# Altium PCB Kayan22v1.PcbDoc
Units mil, origin at the board's own origin, x right, y up, seen from the top; angles counter-clockwise.
Board outline 2340 x 2240 mil, 2 copper layers (Top Layer, Bottom Layer); 31 components, 58 nets, 160 pads, 41 vias.
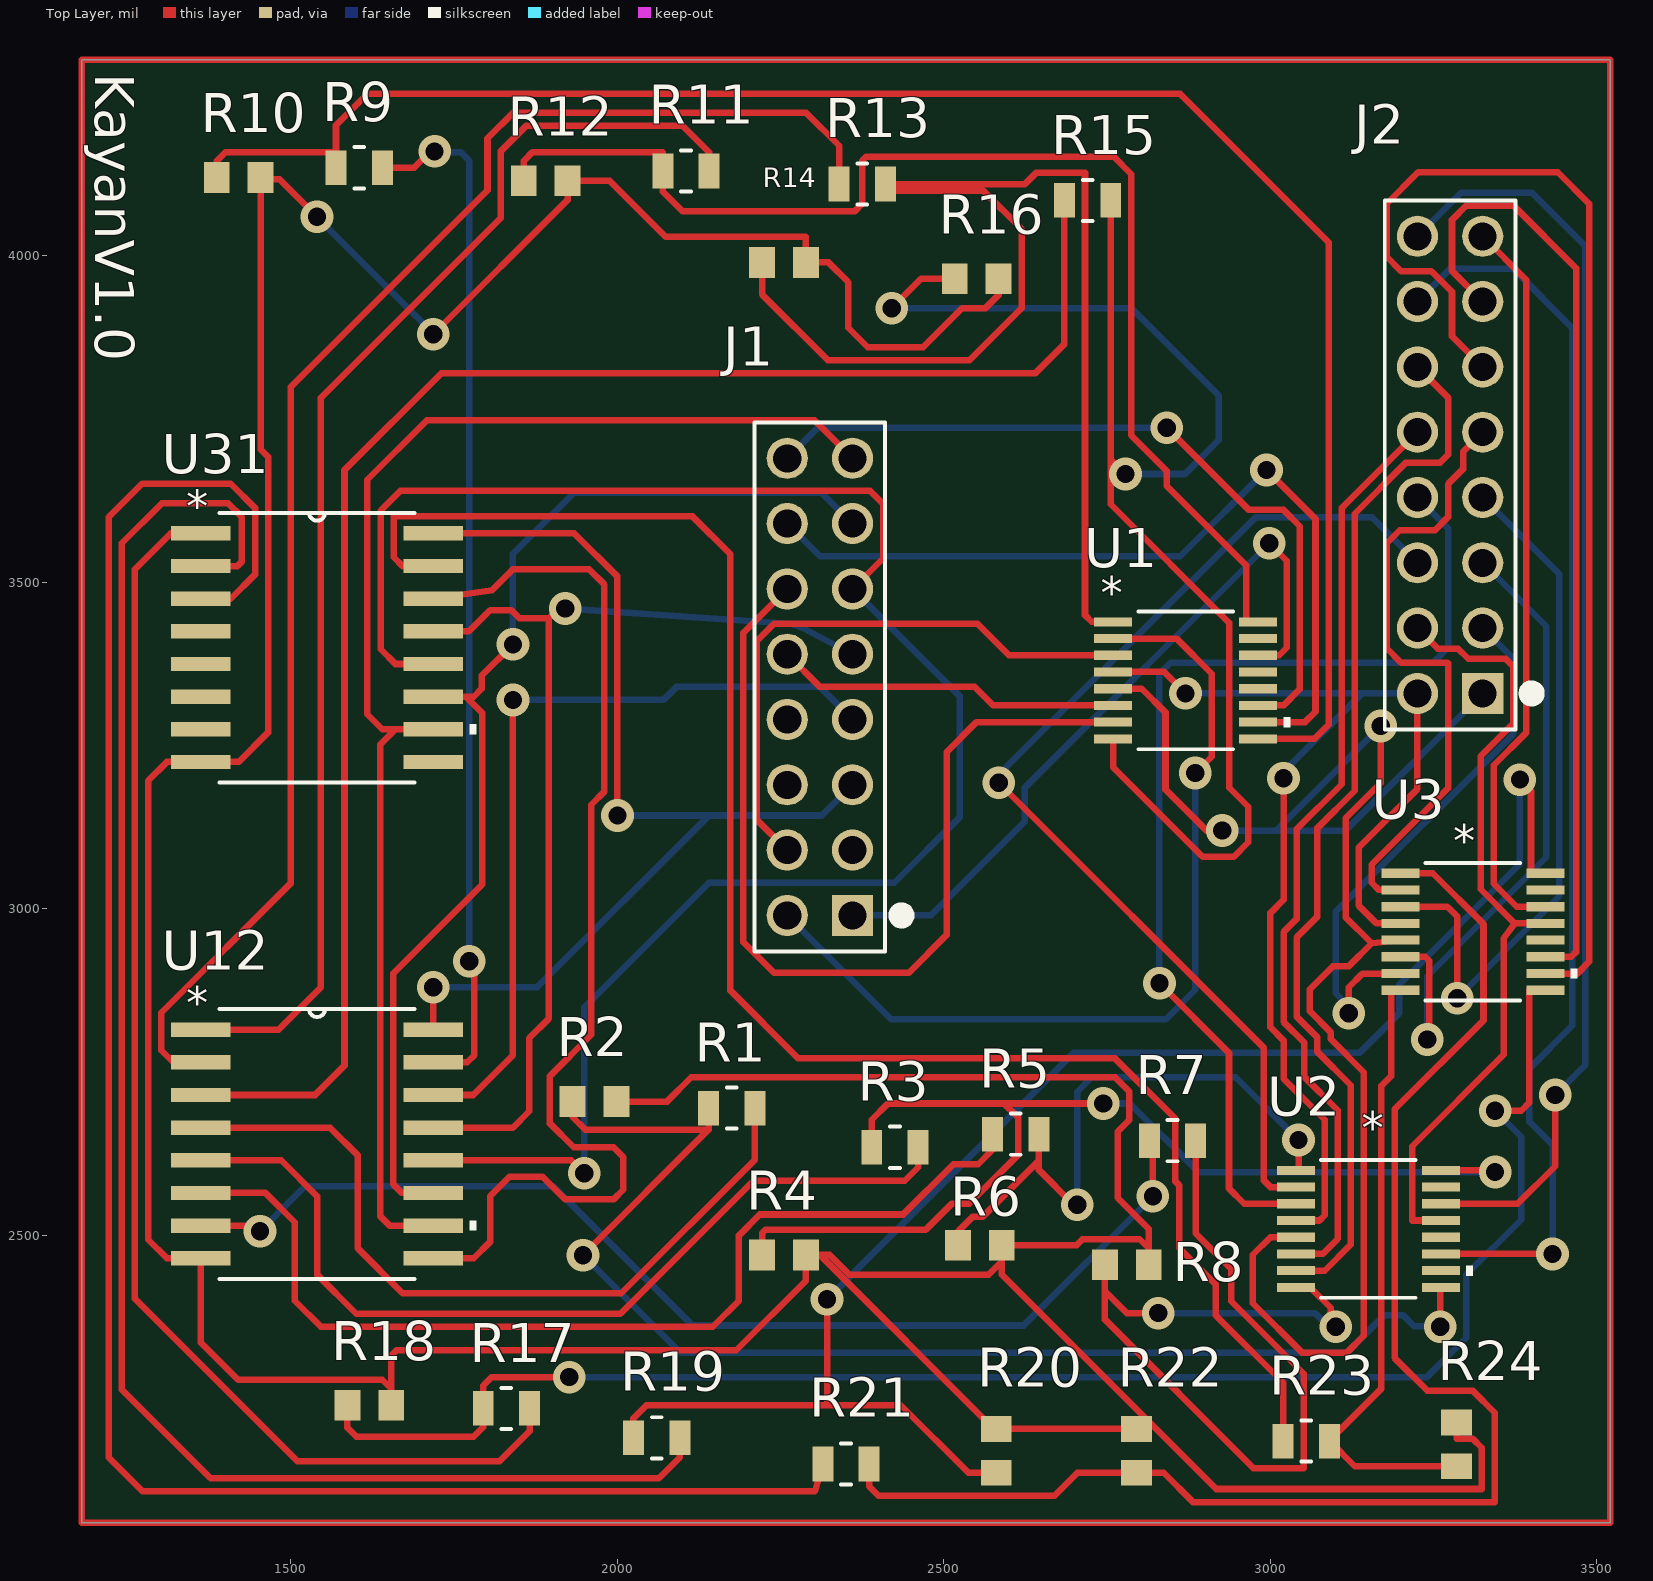
[diagram p0: Top Layer view]
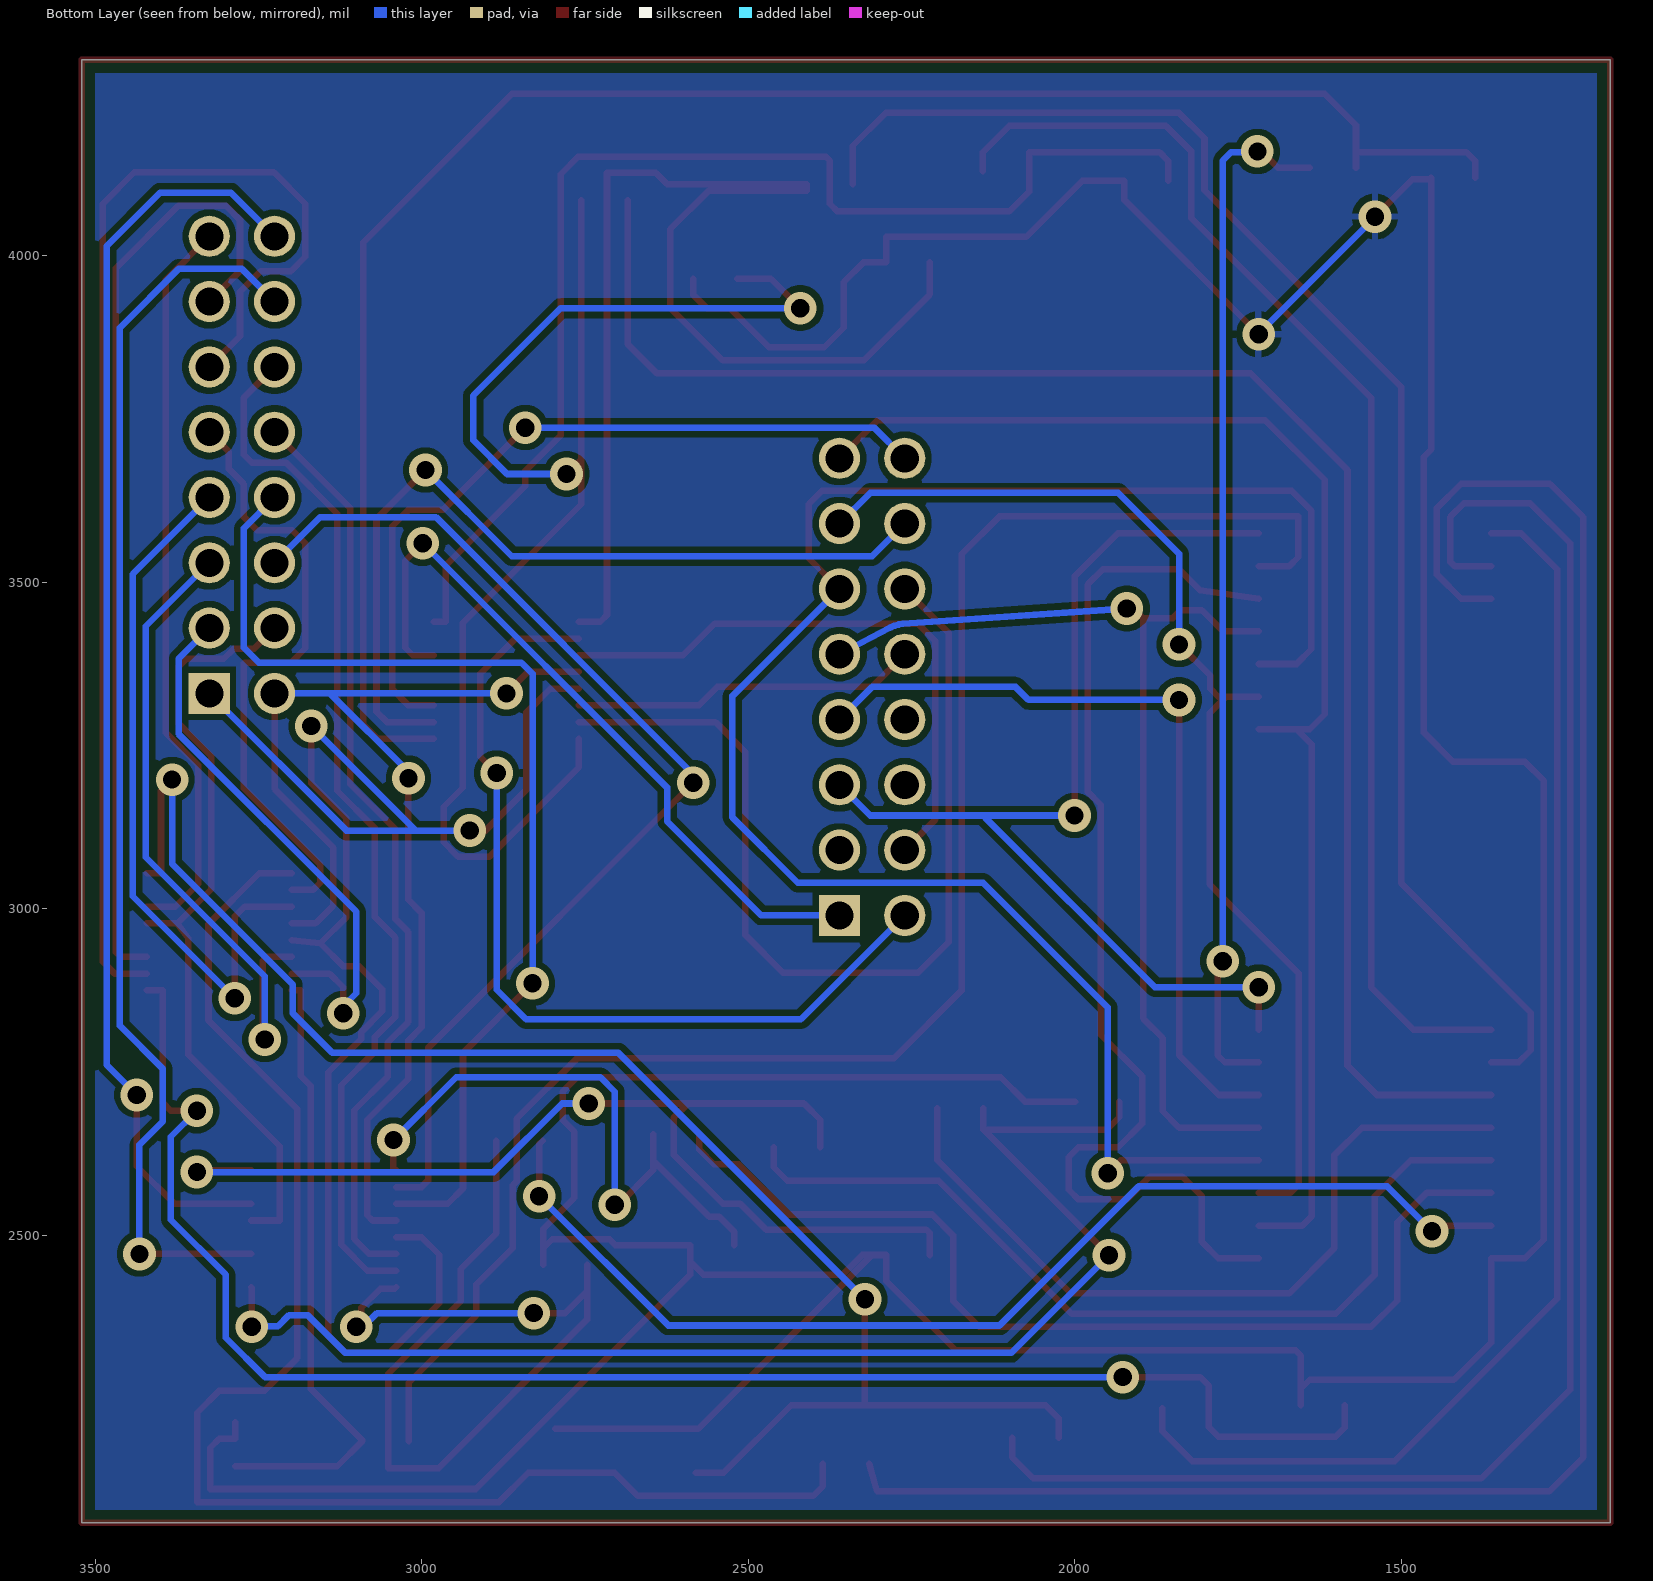
[diagram p1: Bottom Layer view, seen from below]
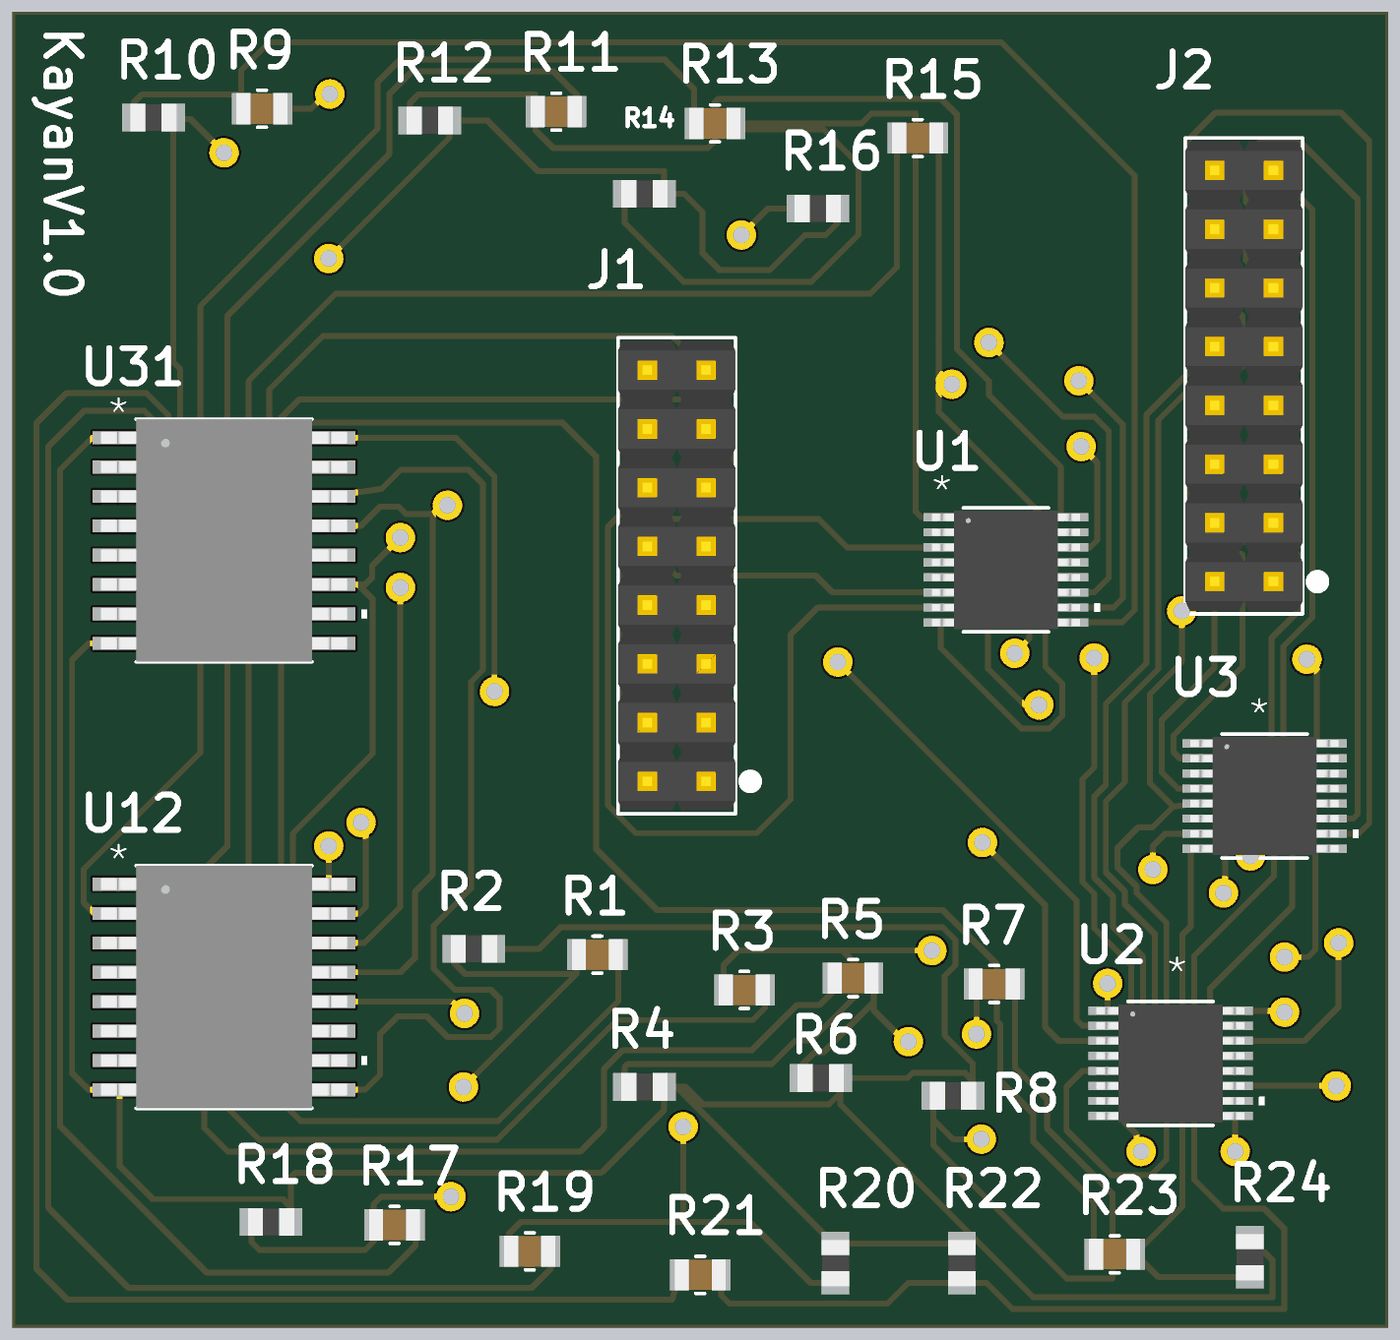
[diagram p2: 3D render of the assembled board from above, using the file's embedded part models]

## Layer stack, top to bottom
Top Solder: solder mask 0.4, Solder Resist, Dk 3.5
Top Layer: signal copper 1.4
Dielectric 1: dielectric 12.6, FR-4, Dk 4.8
Bottom Layer: signal copper 1.4
Bottom Solder: solder mask 0.4, Solder Resist, Dk 3.5

## Board outline
1180,2060 1180,4300 3520,4300 3520,2060

## Design rules (kind name [scope] priority, off if disabled: settings)
Clearance [All] p1: gap=10 ignorepadtopadclearanceinfootprint=FALSE except(0: Arc-Hole Track-Hole SMDPad-Hole THPad-Hole Via-Hole Fill-Hole Poly-Hole Region-Hole Text-Hole)
PolygonConnect [All] p1: connectstyle=Relief reliefconductorwidth=10 reliefentries=4 polygonreliefangle="90 Angle" airgapwidth=10
RoutingVias [All] p1: holewidth=28 width=50 viastyle="Through Hole" minholewidth=28 minwidth=50 maxholewidth=28 maxwidth=50
SolderMaskExpansion [All] p1: expansion=4 istentingtop=FALSE
Width [All] p1: maxlimit=10 minlimit=10 preferedwidth=10
30 further rules are at their usual default settings.

## Components (designator, comment, footprint, x,y, rotation, side; value= is the part's Value field where it differs from the comment)
J1 "68602-116HLF" CONN_68602-116HLF_AMP 2360,2990 r90 top
J2 "68602-116HLF" CONN_68602-116HLF_AMP 3325,3330 r90 top
R1 "470" RES_ERA6V,6K_PAN 2175,2695 r0 top
R2 "220" RC0805N_PAN 1965,2705 r0 top
R3 "470" RES_ERA6V,6K_PAN 2425,2635 r0 top
R4 "220" RC0805N_PAN 2255,2470 r0 top
R5 "470" RES_ERA6V,6K_PAN 2610,2655 r0 top
R6 "220" RC0805N_PAN 2555,2485 r0 top
R7 "470" RES_ERA6V,6K_PAN 2850,2645 r0 top
R8 "220" RC0805N_PAN 2780,2455 r0 top
R9 "470" RES_ERA6V,6K_PAN 1604.5,4135 r0 top
R10 "220" RC0805N_PAN 1420,4120 r0 top
R11 "470" RES_ERA6V,6K_PAN 2105,4130 r0 top
R12 "220" RC0805N_PAN 1890,4115 r0 top
R13 "470" RES_ERA6V,6K_PAN 2375,4110 r0 top
R14 "220" RC0805N_PAN 2255,3990 r0 top
R15 "470" RES_ERA6V,6K_PAN 2720,4085 r0 top
R16 "220" RC0805N_PAN 2550,3965 r0 top
R17 "470" RES_ERA6V,6K_PAN 1830,2235 r0 top
R18 "220" RC0805N_PAN 1620,2240 r0 top
R19 "470" RES_ERA6V,6K_PAN 2060,2190 r0 top
R20 "220" RC0805N_PAN 2580,2170 r90 top
R21 "470" RES_ERA6V,6K_PAN 2350,2150 r0 top
R22 "220" RC0805N_PAN 2795,2170 r90 top
R23 "470" RES_ERA6V,6K_PAN 3055,2185 r0 top
R24 "220" RC0805N_PAN 3285,2180 r90 top
U1 "ADG1412YRUZ-REEL7" RU_16_ADI 2870,3350 r0 top
U2 "ADG1412YRUZ-REEL7" RU_16_ADI 3150,2510 r0 top
U3 "ADG1412YRUZ-REEL7" RU_16_ADI 3310,2965 r0 top
U12 "SN74HC595DWR" DW16 1540,2640 r0 top
U31 "SN74HC595DWR" DW16 1540,3400 r0 top

## Footprints (in the part's own frame and the unit in brackets; to place one, negate y for a bottom-side part, rotate by r counter-clockwise, add the part's x,y. Pads: shape width x height; smd on the part's side, far side on the other; paste and mask are expansions set on the pad)
CONN_68602-116HLF_AMP [mil]
  rect 63x63 hole 43 mask+0: 1(0,0)
  round 63 hole 43 mask+0: 2(0,100) 3(100,0) 4(100,100) 5(200,0) 6(200,100) 7(300,0) 8(300,100) 9(400,0) 10(400,100) 11(500,0) 12(500,100) 13(600,0) 14(600,100) 15(700,0) 16(700,100)
  silkscreen extent -55,-85 755,150, body extent -50,-50 750,150, height 385
DW16 [mil]
  rect 91x22 smd: 1(-178,175) 2(-178,125) 3(-178,75) 4(-178,25) 5(-178,-25) 6(-178,-75) 7(-178,-125) 8(-178,-175) 9(178,-175) 10(178,-125) 11(178,-75) 12(178,-25) 13(178,25) 14(178,75) 15(178,125) 16(178,175)
  silkscreen extent -150,-206 244,206, body extent -209,-206 209,206, height 104
RC0805N_PAN [mm]
  rect 1.006x1.2 smd paste+0 mask+0: 1(-0.853,0) 2(0.853,0)
  body extent -1,-0.6 1,0.6, height 0.71
RES_ERA6V,6K_PAN [mil]
  rect 32x53 smd paste+0 mask+0: 1(-35.5,0) 2(35.5,0)
  silkscreen extent -7,-32 7,32, body extent -44,-26 44,26, height 26
RU_16_ADI [mil]
  rect 58x14 smd paste+0 mask+0: 1(-111,89.57) 2(-111,63.98) 3(-111,38.39) 4(-111,12.8) 5(-111,-12.8) 6(-111,-38.39) 7(-111,-63.98) 8(-111,-89.57) 9(111,-89.57) 10(111,-63.98) 11(111,-38.39) 12(111,-12.8) 13(111,12.8) 14(111,38.39) 15(111,63.98) 16(111,89.57)
  silkscreen extent -72,-106 160,106, body extent -126,-101 126,101, height 47

## Part data
J1 J2: "No Description Available", Mfr_Name="Amphenol ICC", Copyright="Copyright (C) 2023 Ultra Librarian. All rights reserved.", Digi-Key_Part_Number_1=609-3364-ND, Manufacturer_Part_Number=68602-116HLF, RefDes=RefDes, Type=DEV
R1 R3 R5 R7 R9 R11 R13 R15 R17 R19 R21 R23: library part ERA-6VEB4700V, "No Description Available", Mfr_Name=Panasonic, Copyright="Copyright (C) 2023 Ultra Librarian. All rights reserved.", Digi-Key_Part_Number_1=10-ERA-6VEB4700VTR-ND, Digi-Key_Part_Number_2=10-ERA-6VEB4700VCT-ND, Digi-Key_Part_Number_3=10-ERA-6VEB4700VDKR-ND, Manufacturer_Part_Number=ERA-6VEB4700V, RefDes=RefDes, Type=DEV
R2 R4 R6 R8 R10 R12 R14 R16 R18 R20 R22 R24: library part ERA-6AEB221V, "No Description Available", Mfr_Name=Panasonic, Copyright="Copyright (C) 2023 Ultra Librarian. All rights reserved.", Manufacturer_Part_Number=ERA-6AEB221V, RefDes=RefDes, Type=DEV
U1 U2 U3: "No Description Available", Mfr_Name="Analog Devices Inc", Copyright="Copyright (C) 2023 Ultra Librarian. All rights reserved.", Digi-Key_Part_Number_1=ADG1412YRUZ-REEL7CT-ND, Digi-Key_Part_Number_2=ADG1412YRUZ-REEL7DKR-ND, Digi-Key_Part_Number_3=ADG1412YRUZ-REEL7TR-ND, Manufacturer_Part_Number=ADG1412YRUZ-REEL7, RefDes=RefDes, Type=DEV
U12 U31: "No Description Available", Mfr_Name="Texas Instruments", Copyright="Copyright (C) 2023 Ultra Librarian. All rights reserved.", Manufacturer_Part_Number=SN74HC595DWR, RefDes=RefDes, Type=DEV

## Via types
v1: diameter 50, hole 28, Top Layer to Bottom Layer, 41 vias

## Nets (pads, with @x,y where several pads share a name; then routed paths per layer and width w, separated by ;. In a path a pad name is that pad's centre, name@x,y a point inside that pad or via, vN(x,y) a via of type N, cw(c..) or ccw(c..) an arc to the next point about the centre after c; other vN are vias at no path point)
NetJ1_1: J1.1 U1.14 | length 1124.4
  Top Layer w10: U1.14 3013.39,3388.39 3025,3400 3025,3533 v1(2998,3560)
  Bottom Layer w10: J1.1 2479.78,2990 2624,3134.22 2624,3186 v1(2998,3560)
NetJ1_2: J1.2 U1.2 | length 1377.2
  Top Layer w10: U1.2 2856.02,3413.98 2910,3360 2910,3233 v1(2885,3208)
  Bottom Layer w10: J1.2 2419,2831 2840,2831 2885,2876 v1(2885,3208)
NetJ1_4: J1.4 U1.3 | length 916.8
  Top Layer w10: J1.4 2213,3137 2213,3410 2240,3437 2551,3437 2599.61,3388.39 U1.3
NetJ1_5: J1.5 U12.16 U31.16 | length 1646.5
  Top Layer w10: U12.16 v1(1718,2880) ; U31.16 1934,3575 2000,3509 v1(2000,3143)
  Bottom Layer w10: v1(1718,2880) 1877,2880 2137,3140 ; v1(2000,3143) 2313,3143 J1.5
NetJ1_7: J1.7 U12.14 | length 1240.3
  Top Layer w10: U12.14 1779,2715 1840,2776 v1(1840,3320)
  Bottom Layer w10: v1(1840,3320) 2070.41,3320 2090.41,3340 2310,3340 J1.7
NetJ1_9: J1.9 U12.13 U31.13 | length 1603.4
  Top Layer w10: U12.13 1840,2665 1865.05,2690.05 1865.05,2802.26 1895,2832.21 1895,3445 ; U31.13 1772.57,3425 1805,3457.43 1837.59,3457.43 1850.02,3445 1895,3445 ; v1(1920,3460) 1910,3460 1895,3445
  Bottom Layer w10: v1(1920,3460) 2263.19,3436.39 cw(c2260,3390) 2281.62,3431.17 2282.97,3430.46 J1.9
NetJ1_10: J1.10 U1.6 | length 531.5
  Top Layer w10: J1.10 2310,3340 2547,3340 2575.39,3311.61 U1.6
NetJ1_11: J1.11 U12.12 U31.12 | length 2848.7
  Top Layer w10: U12.12 1929,2615 v1(1949,2595) ; U31.12 1660,3375 1637.5,3397.5 1637.5,3610 1667.5,3640 2387,3640 2407,3620 2407,3537 J1.11
  Bottom Layer w10: v1(1949,2595) 1949,2849 2140,3040 2424,3040 2524,3140 2524,3326 J1.11
NetJ1_12: J1.12 U1.7 | length 1477.3
  Top Layer w10: J1.12 2193,3423 2193,2949 2240,2902 2446,2902 2504,2960 2504,3240 2550.02,3286.02 U1.7
NetJ1_13: J1.13 U12.11 U31.11 | length 1763.9
  Top Layer w10: U12.11 1670,2565 1657,2578 1657,2901.45 1793,3037.45 1793,3300 1768,3325 ; U31.11 1768,3325 ; v1(1840,3405) 1792,3357 1792,3337 1780,3325 1768,3325
  Bottom Layer w10: v1(1840,3405) 1840,3544 1933,3637 2313,3637 J1.13
NetJ1_14: J1.14 U1.10 | length 1305.1
  Top Layer w10: U1.10 3053,3286.02 3069,3302.02 3069,3597 v1(2994,3672)
  Bottom Layer w10: J1.14 2310,3540 2862,3540 v1(2994,3672)
NetJ1_15: J1.15 U12.10 U31.10 | length 2116.7
  Top Layer w10: U12.10 1651,2515 1637,2529 1637,3252 1660,3275 ; U31.10 1660,3275 ; J1.15 2302,3748 1707.82,3748 1617,3657.18 1617,3298 1640,3275 1660,3275
NetJ1_16: J1.16 U1.11 | length 1190.8
  Top Layer w10: v1(2841,3737) 2967,3611 3020,3611 3045,3586 3045,3336.61 3020,3311.61 U1.11
  Bottom Layer w10: J1.16 2307,3737 v1(2841,3737)
NetJ1_17: R2.2 R4.2 R6.2 R8.2 R10.2 R12.2 R14.2 R16.2 R18.2 R20.2 R22.2 R24.2 U12.8 U31.8 | length 7985.5
  Top Layer w10: v1(1540,4060) 1482.51,4117.49 1456.09,4117.49 R10.2 1453.57,3703.73 1465,3692.3 1465,3270 1420,3225 U31.8 1310,3225 1281.5,3196.5 1281.5,2493.5 1310,2465 U12.8 1362,2336 1419,2279 1640,2279 1653.57,2265.43 ; R18.2 1653.57,2265.43 ; v1(1718,3880) 1923.57,4085.57 R12.2 1988,4115 2074,4029 2288.57,4029 R14.2 2323.37,3990 2353.4,3959.97 2353.4,3890.03 2383.43,3860 2468,3860 2528,3920 2563.57,3920 2583.57,3940 R16.2 ; R2.2 2076,2705 2113,2742 2762,2742 2784,2720 2784,2677 2766,2659 2766,2557.43 2813.57,2509.86 2813.57,2480.43 ; R22.2 2687,2203.57 R20.2 2576.43,2203.57 2310,2470 ; R8.2 2813.57,2480.43 ; R24.2 3285,2188.38 3310,2188.38 3323.62,2174.76 3323.62,2111.63 2916.94,2111.63 2588.57,2440 2588.57,2460 ; 1653.57,2265.43 1653.57,2316 1661.57,2324 2182,2324 2288.57,2430.57 R4.2 2310,2470 ; 2310,2470 2325,2470 2355,2440 2568.57,2440 2588.57,2460 ; 2588.57,2460 R6.2 2703,2485 2712,2494 2800,2494 2813.57,2480.43
  Bottom Layer w10: v1(1540,4060) 1540,4059 1718,3881 v1(1718,3880)
NetJ1_18: U1.15
NetJ2_1: J2.1 U1.5 U2.5 U3.5 | length 2507.1
  Top Layer w10: U1.5 2803,3337.2 2839.26,3300.94 2839.26,3182.66 2901.92,3120 v1(2926,3120) ; U2.5 3000,2497.2 2973,2470.2 2973,2396 3049,2320 3116.57,2320 3143,2346.43 3143,2750 3092,2801 3092,2811.43 3060,2843.43 3060,2876.57 3095.32,2911.89 3119.68,2911.89 3155,2947.2 ; v1(3169,3280) 3169,3192.65 3115,3138.65 3115,2987.2 3155,2947.2 ; U3.5 3155,2947.2
  Bottom Layer w10: v1(2926,3120) 3009,3120 ; v1(3169,3280) 3009,3120 ; J2.1 3115,3120 3009,3120
NetJ2_2: J2.2 U1.4 U2.4 U3.4 | length 1855.8
  Top Layer w10: U1.4 2837.2,3362.8 v1(2870,3330) ; v1(3020,3200) 3020,3013.88 3000,2993.88 3000,2818.58 3020,2798.58 3020,2740 3083,2677 3083,2530.8 3075,2522.8 U2.4 ; U3.4 3162.59,2977.8 3135,3005.39 3135,3093.79 3225,3183.79 J2.2
  Bottom Layer w10: v1(2870,3330) 3140,3330 ; v1(3020,3200) 3020,3210 3140,3330 ; J2.2 3140,3330
NetJ2_3: J2.3 U3.7 | length 858.1
  Top Layer w10: v1(3120,2840) 3120,2880 3141.02,2901.02 U3.7
  Bottom Layer w10: v1(3120,2840) 3120,2850.82 3100,2870.82 3100,2995.94 3372,3267.94 3372,3383 J2.3
NetJ2_4: J2.4 U2.13 U3.13 | length 1216.1
  Top Layer w10: J2.4 3256.54,3398.46 3287.3,3398.46 3302.75,3383 3360,3383 3371.5,3371.5 3371.5,3283.5 3322,3234 3322,3030 3374.2,2977.8 ; U2.13 3217,2522.8 3217,2636.63 3357,2776.63 3357,2954.8 3374.2,2977.8 ; U3.13 3374.2,2977.8
NetJ2_5: J2.5 U3.6 | length 1014.2
  Top Layer w10: U3.6 3237.14,2926.61 3243,2920.76 3243,2803 v1(3240,2800)
  Bottom Layer w10: v1(3240,2800) 3240,2897 3422.26,3079.26 3422.26,3432.74 J2.5
NetJ2_6: J2.6 U2.2 | length 1676.5
  Top Layer w10: v1(2584,3193.14) 2990,2787.14 2990,2583.98 3000,2573.98 U2.2
  Bottom Layer w10: v1(2584,3193.14) 2584,3206 2978,3600 3155,3600 J2.6
NetJ2_7: J2.7 U3.3 | length 1098.9
  Top Layer w10: U3.3 3271,3003.39 3286,2988.39 v1(3286,2863)
  Bottom Layer w10: v1(3286,2863) 3442.26,3019.26 3442.26,3512.74 J2.7
NetJ2_8: J2.8 U2.3 | length 1652.5
  Top Layer w10: v1(2830,2886) 2936.5,2779.5 2936.5,2571.89 2960,2548.39 U2.3
  Bottom Layer w10: v1(2830,2886) 2830,3360 2847,3377 3249,3377 3272,3400 3272,3583 J2.8
NetJ2_9: J2.9 U3.2 | length 960.1
  Top Layer w10: U3.2 3166.02,3028.98 3155,3040 3155,3067.92 3272,3184.92 3272,3376 3271,3377 3200,3377 3178,3399 3178,3560 3198,3580 3252,3580 3272,3600 3272,3650.59 3295,3673.59 3295,3700 J2.9
NetJ2_10: J2.10 U2.6 | length 1428.2
  Top Layer w10: U2.6 3080,2471.61 3103,2494.61 3103,2691.69 3052,2742.69 3052,2794.86 3020,2826.86 3020,2964.43 3040,2984.43 3040,3122 3109,3191 3109,3614 J2.10
NetJ2_11: J2.11 U3.10 | length 1923.3
  Top Layer w10: J2.11 3278,3877 3278,3945 3246.5,3976.5 3200,3976.5 3178,3998.5 3178,4080 3226,4128 3440,4128 3488,4080 3488,2919.02 3470,2901.02 U3.10
NetJ2_12: J2.12 U2.7 | length 1625.3
  Top Layer w10: U2.7 3083.02,2446.02 3123,2486 3123,2730 3072,2781 3072,2803.15 3040,2835.15 3040,2956.15 3072,2988.15 3072,3124 3129,3181 3129,3605 3207.5,3683.5 3260,3683.5 3272,3695.5 3272,3783 J2.12
NetJ2_13: J2.13 U3.11 | length 1480.4
  Top Layer w10: J2.13 3278,3977 3278,4055 3300,4077 3372,4077 3468,3981 3468,2934 3460.61,2926.61 U3.11
NetJ2_14: J2.14 U2.11 | length 1926.8
  Top Layer w10: U2.11 v1(3432,2471.61)
  Bottom Layer w10: J2.14 3275,3980 3372,3980 3462.26,3889.74 3462.26,2821.26 3396,2755 3396,2674.71 3432,2638.71 v1(3432,2471.61)
NetJ2_15: J2.15 U3.14 | length 1133.2
  Top Layer w10: J2.15 3391.5,3963.5 3391.5,3269.5 3342,3220 3342,3038.39 3377,3003.39 U3.14
NetJ2_16: J2.16 U2.14 | length 1945.9
  Top Layer w10: U2.14 3378.39,2548.39 3436,2606 v1(3436,2715)
  Bottom Layer w10: J2.16 3292,4097 3400,4097 3482.26,4014.74 3482.26,2761.26 v1(3436,2715)
NetJ2_17: U3.15
NetJ2_18: U2.15
NetR1_1: R1.1 R2.1 U2.9 | length 2011.9
  Top Layer w10: R2.1 1931.43,2681.1 1950.52,2662.01 2139.5,2662.01 ; v1(1947.25,2469.75) 2139.5,2662 ; R1.1 2139.5,2662.01 ; v1(3260,2360) 3260,2419.43 U2.9
  Bottom Layer w10: v1(1947.25,2469.75) 2097,2320 3116.57,2320 3174.57,2378 3202.87,2378 3220,2360.87 3259.13,2360.87 v1(3260,2360)
NetR1_2: R1.2 U12.4 | length 1200.7
  Top Layer w10: U12.4 1560,2665 1602.5,2622.5 1602.5,2480 1671,2411.5 2006,2411.5 2210.5,2616 R1.2
NetR3_1: R3.1 R4.1 U2.16 | length 1697.5
  Top Layer w10: R4.1 2221.43,2503.43 2227,2509 2472.38,2509 2512.13,2548.75 2538.85,2548.75 2614,2623.9 2614,2680 2592,2702 ; R3.1 2389.5,2677 2414.5,2702 2592,2702 ; v1(2744,2702) 2592,2702 ; U2.16 3341.43,2599.57 v1(3344,2597)
  Bottom Layer w10: v1(2744,2702) 2784.63,2702 2889.63,2597 v1(3344,2597)
NetR3_2: R3.2 U12.5 | length 1389.8
  Top Layer w10: U12.5 1485,2615 1540,2560 1540,2440 1600,2380 2004.51,2380 2208.29,2583.79 2440,2583.79 2460.5,2604.29 R3.2
NetR5_1: R5.1 U12.6 | length 1562.5
  Top Layer w10: U12.6 1461,2565 1506,2520 1506,2400 1546,2360 2146,2360 2186,2400 2186,2500 2218,2532 2437.46,2532 2514.46,2609 2552.5,2609 2574.5,2631 R5.1
NetR5_2: R5.2 R6.1 U2.1 | length 936.7
  Top Layer w10: R6.1 2521.43,2505.89 2544.28,2528.75 2559.75,2528.75 2645.5,2614.5 ; R5.2 2645.5,2614.5 ; v1(2704,2547) 2698.5,2547 2645.5,2600 2645.5,2614.5 ; U2.1 3043,2599.57 v1(3043,2646)
  Bottom Layer w10: v1(2704,2547) 2704,2720 2726,2742 2947,2742 v1(3043,2646)
NetR7_1: R7.1 U12.7 | length 1747.4
  Top Layer w10: U12.7 1444,2515 v1(1452.5,2506.5) ; R7.1 2820,2639.5 v1(2820,2560)
  Bottom Layer w10: v1(1452.5,2506.5) 1521,2575 1902,2575 2115,2362 2622,2362 v1(2820,2560)
NetR7_2: R7.2 R8.1 U2.8 | length 1527.6
  Top Layer w10: R8.1 2746.43,2414.57 ; v1(2828,2381) 2780,2381 2746.43,2414.57 ; R7.2 2885.5,2503 2940,2448.5 2940,2399 3051,2288 3051,2143.5 2974,2143.5 2746.43,2371.07 2746.43,2414.57 ; U2.8 3041,2418.43 3063,2418.43 3092.35,2389.09 3092.35,2367.65 v1(3100,2360)
  Bottom Layer w10: v1(2828,2381) 3068.18,2381 3089.18,2360 v1(3100,2360)
NetR9_1: R9.1 R10.1 U1.9 | length 2768.5
  Top Layer w10: R10.1 1386.43,4145.43 1400,4159 R9.1@1569,4159 ; R9.1 R9.1@1569,4159 ; U1.9 3067.43,3260.43 3089,3282 3089,4021 2862,4248 1617,4248 1569,4200 R9.1@1569,4159
NetR9_2: R9.2 U12.15 | length 1590
  Top Layer w10: R9.2 1688.43,4135 1713.43,4160 v1(1720,4160) ; U12.15 1770,2765 1781,2776 1781,2912 v1(1773,2920)
  Bottom Layer w10: v1(1720,4160) 1721,4159 1760,4159 1773,4146 v1(1773,2920)
NetR11_1: R11.1 R12.1 U1.16 | length 1900.7
  Top Layer w10: R12.1 1856.43,4145.43 1870,4159 2069.5,4159 R11.1 2069.5,4098.5 2100,4068 2363,4068 2375,4080 2375,4146 2381,4152 2760,4152 2787,4125 2787,3725 2841,3671 2841,3648 2963,3526 2963,3439.57 U1.16
NetR11_2: R11.2 U12.1 | length 1985.8
  Top Layer w10: U12.1 1481,2815 1546,2880 1546,3782.81 1821,4057.81 1821,4160 1860,4199 2100,4199 2140.5,4158.5 R11.2
NetR13_1: R13.1 U12.2 | length 2305.6
  Top Layer w10: U12.2 1320,2765 1301.5,2783.5 1301.5,2841 1500,3039.5 1500,3799.54 1801,4100.54 1801,4180 1840,4219 2289,4219 2339.5,4168.5 R13.1
NetR13_2: R13.2 R14.1 U1.1 | length 1922.3
  Top Layer w10: R14.1 2221.43,3941 2322.43,3840 2539,3840 2619,3920 2619,4041 2560,4100 2410.5,4100 R13.2 2624,4110 2641,4127 2716,4127 2716,3450 2726.43,3439.57 U1.1
NetR15_1: R15.1 U12.3 | length 2553.1
  Top Layer w10: U12.3 1537,2715 1582,2760 1582,3672 1730,3820 2639.5,3820 2684.5,3865 R15.1
NetR15_2: R15.2 R16.1 U1.8 | length 2322.4
  Top Layer w10: v1(2420,3920) 2465,3965 R16.1 ; R15.2 2755.5,3688.5 ; U1.8 2759,3217 2896,3080 2944,3080 2966,3102 2966,3156.49 2937,3185.49 2937,3438 2755.5,3619.5 2755.5,3688.5 ; v1(2778,3666) 2755.5,3688.5
  Bottom Layer w10: v1(2420,3920) 2787,3920 2921,3786 2921,3718 2869,3666 v1(2778,3666)
NetR17_1: R17.1 R18.1 U3.9 | length 2506.9
  Top Layer w10: R18.1 1586.43,2205.57 1600,2192 1780,2192 1794.5,2206.5 R17.1 1794.5,2270 1807.5,2283 v1(1926,2283) ; v1(3344,2691) 3384,2691 3396,2703 3396,2875.43 U3.9
  Bottom Layer w10: v1(1926,2283) 3239.57,2283 3300,2343.43 3300,2440 3384,2524 3384,2651 v1(3344,2691)
NetR17_2: R17.2 U31.1 | length 2002.5
  Top Layer w10: U31.1 1316,3575 1261,3520 1261,2403 1510,2154 1819.5,2154 1865.5,2200 R17.2
NetR19_1: R19.1 R20.1 U3.16 | length 2463.2
  Top Layer w10: R19.1 2024.5,2220 2044.5,2240 2321,2240 ; v1(2321,2402) 2321,2240 ; R20.1 2537.57,2136.43 2434,2240 2321,2240 ; v1(3382,3198) 3399,3181 3399,3054.57 U3.16
  Bottom Layer w10: v1(2321,2402) 2699,2780 3137,2780 3197,2840 3197,2884 3382,3069 v1(3382,3198)
NetR19_2: R19.2 U31.2 | length 2602
  Top Layer w10: U31.2 1418.11,3525 1425,3531.89 1425,3600 1404,3621 1302,3621 1241,3560 1241,2264 1377,2128 2063.5,2128 2095.5,2160 R19.2
NetR21_1: R21.1 U31.3 | length 3047.5
  Top Layer w10: U31.3 1408,3475 1445,3512 1445,3614 1408,3651 1272,3651 1221,3600 1221,2160 1273,2108 2302.5,2108 R21.1
NetR21_2: R21.2 R22.1 U3.1 | length 2237.3
  Top Layer w10: R21.2 2385.5,2115.5 2400,2101 2669,2101 2704.43,2136.43 R22.1 2836.57,2136.43 2881.37,2091.63 3343.62,2091.63 3343.62,2228.38 3309.59,2262.41 3240,2262.41 3190,2312.41 3190,2693 3326.26,2829.26 3326.26,2976.74 3248.43,3054.57 U3.1
NetR23_1: R23.1 U31.15 | length 2660.9
  Top Layer w10: U31.15 1671,3525 1657.5,3538.5 1657.5,3601 2115,3601 2173,3543 2173,2875 2277,2771 2762,2771 2854.5,2678.5 2854.5,2582.5 2860,2577 2860,2481 2916.18,2424.82 2916.18,2377.5 3019.5,2274.18 R23.1
NetR23_2: R23.2 R24.1 U3.8 | length 954.2
  Top Layer w10: U3.8 3184.77,2875.43 3184.77,2743.76 3170,2728.99 3170,2265.5 3090.5,2186 R23.2 3129.07,2146.43 R24.1
NetU12_9: U12.9 U31.14 | length 1733.8
  Top Layer w10: U12.9 1780,2465 1805,2490 1805,2560 1835,2590 1885,2590 1920,2555 1994,2555 2009,2570 2009,2620 1994,2635 1933,2635 1896.63,2671.37 1896.63,2744 1960,2807.37 1960,3159.57 1980,3179.57 1980,3496.57 1956.57,3520 1840,3520 1808,3488 U31.14
pads on no net: J1.3 J1.6 J1.8 U1.12 U1.13 U2.10 U2.12 U3.12 U31.4 U31.5 U31.6 U31.7 U31.9
copper on no net: | length 9160
  Top Layer w10: 1180,2060 1180,4300 3520,4300 3520,2060 1180,2060

## Polygon pours and split planes (outlines as drawn)
NetJ1_17 on Bottom Layer "NETJ1_17_L02_P000" (solid, pour order 0): 1200,4280 3500,4280 3500,2080 1200,2080

## Silkscreen, mask and mechanical layers (free items; w line width, h text height)
Top Overlay:
  text "KayanV1.0" at 1200,4280 h60 r270

## Text inside footprints (layer, text, board x,y; h text height)
U1: Top Overlay "*" at 2740,3460 h50; Mechanical 13 "*" at 2784,3397.5 h50
U2: Top Overlay "*" at 3140,2640 h50; Mechanical 13 "*" at 3064,2557.5 h50
U3: Top Overlay "*" at 3280,3080 h50; Mechanical 13 "*" at 3224,3012.5 h50
U12: Top Overlay "*" at 1339.5,2832 h50; Mechanical 13 "*" at 1339.5,2832 h50
U31: Top Overlay "*" at 1339.5,3592 h50; Mechanical 13 "*" at 1339.5,3592 h50